# Altium PCB Ricky and Min Lin - ART Robot.PCBDOC
Units mm, origin at the board's own origin, x right, y up, seen from the top; angles counter-clockwise.
Board outline 53.34 x 68.58 mm, 2 copper layers (Top Layer, Bottom Layer), stack 1.671 mm thick; 25 components, 37 nets, 143 pads, 0 vias.
Unrouted connection lines stored in the file: 77.
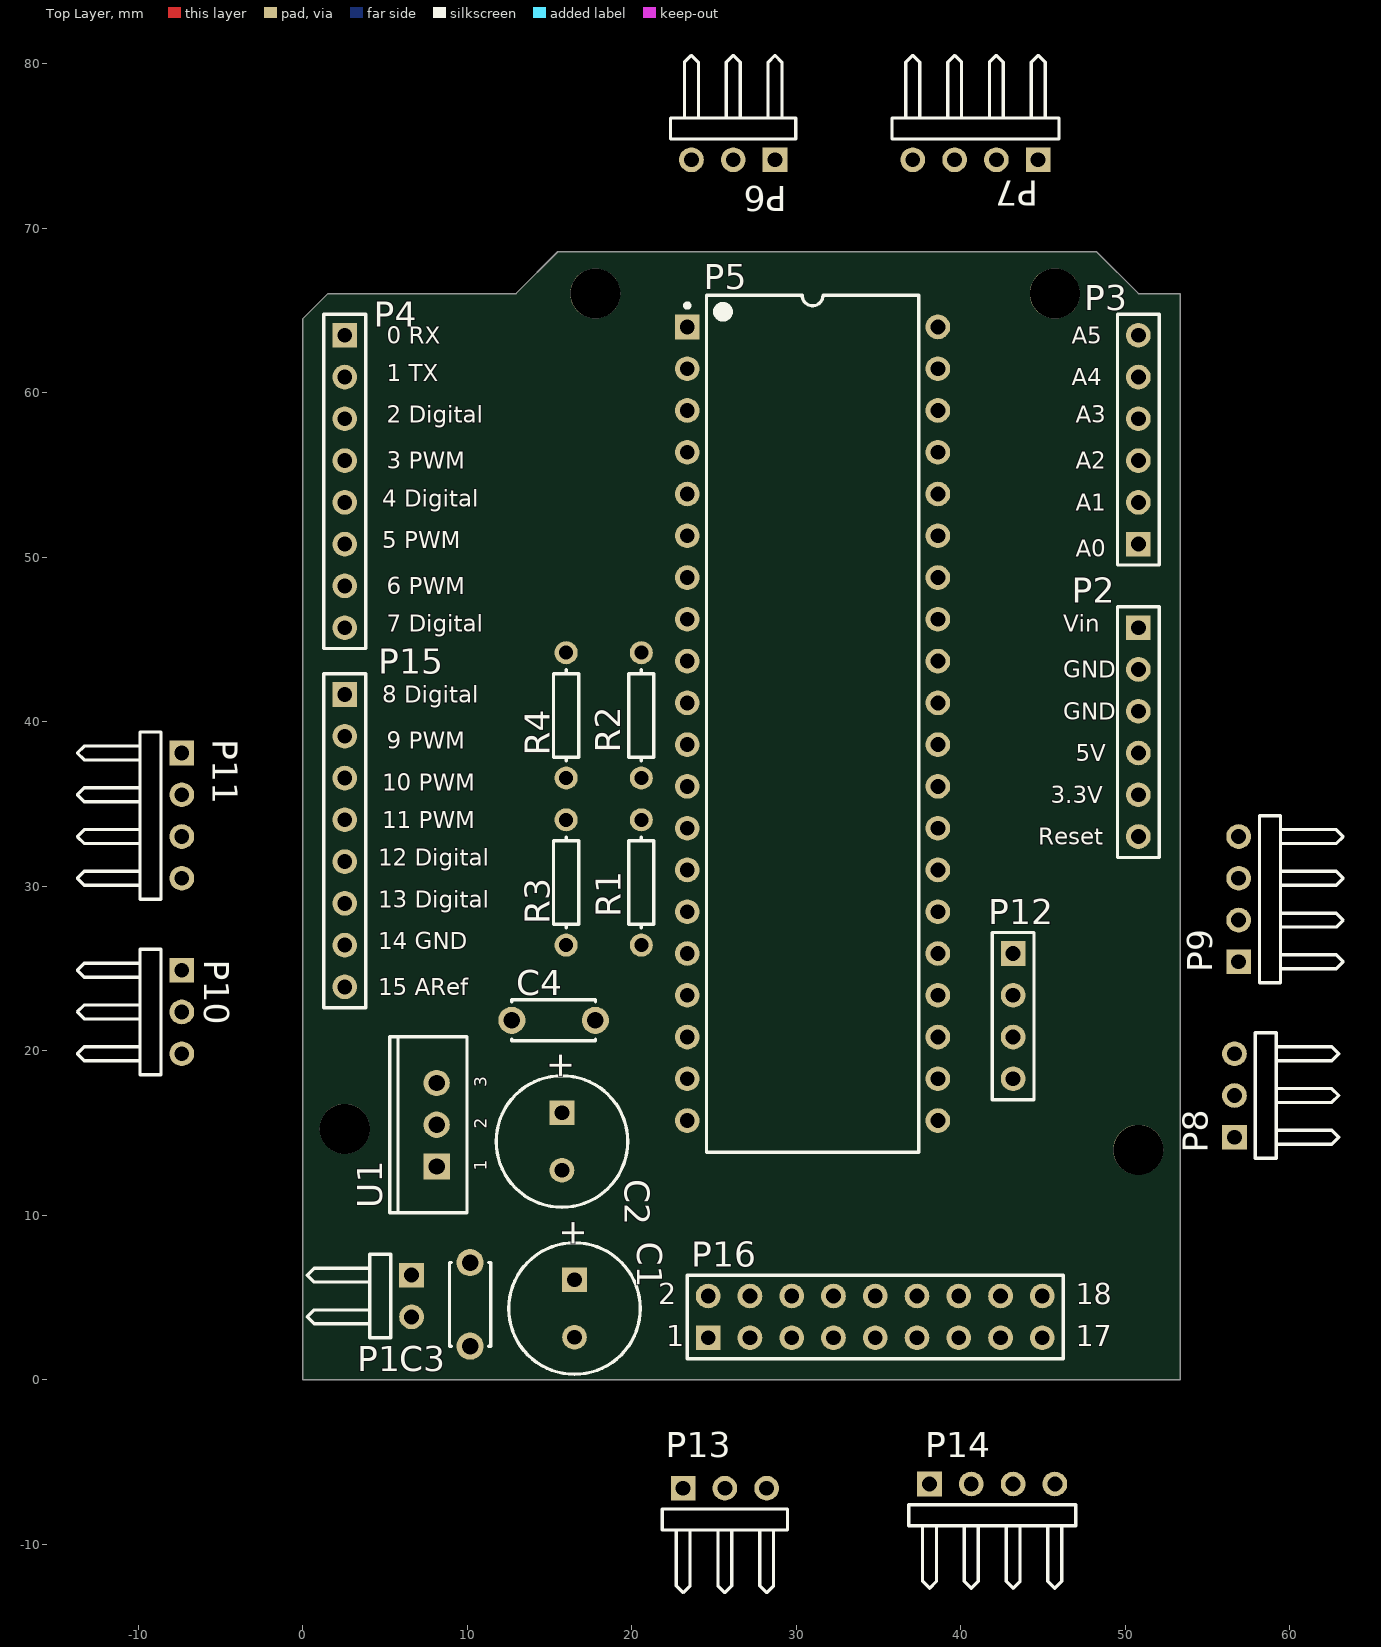
[diagram p0: Top Layer view]
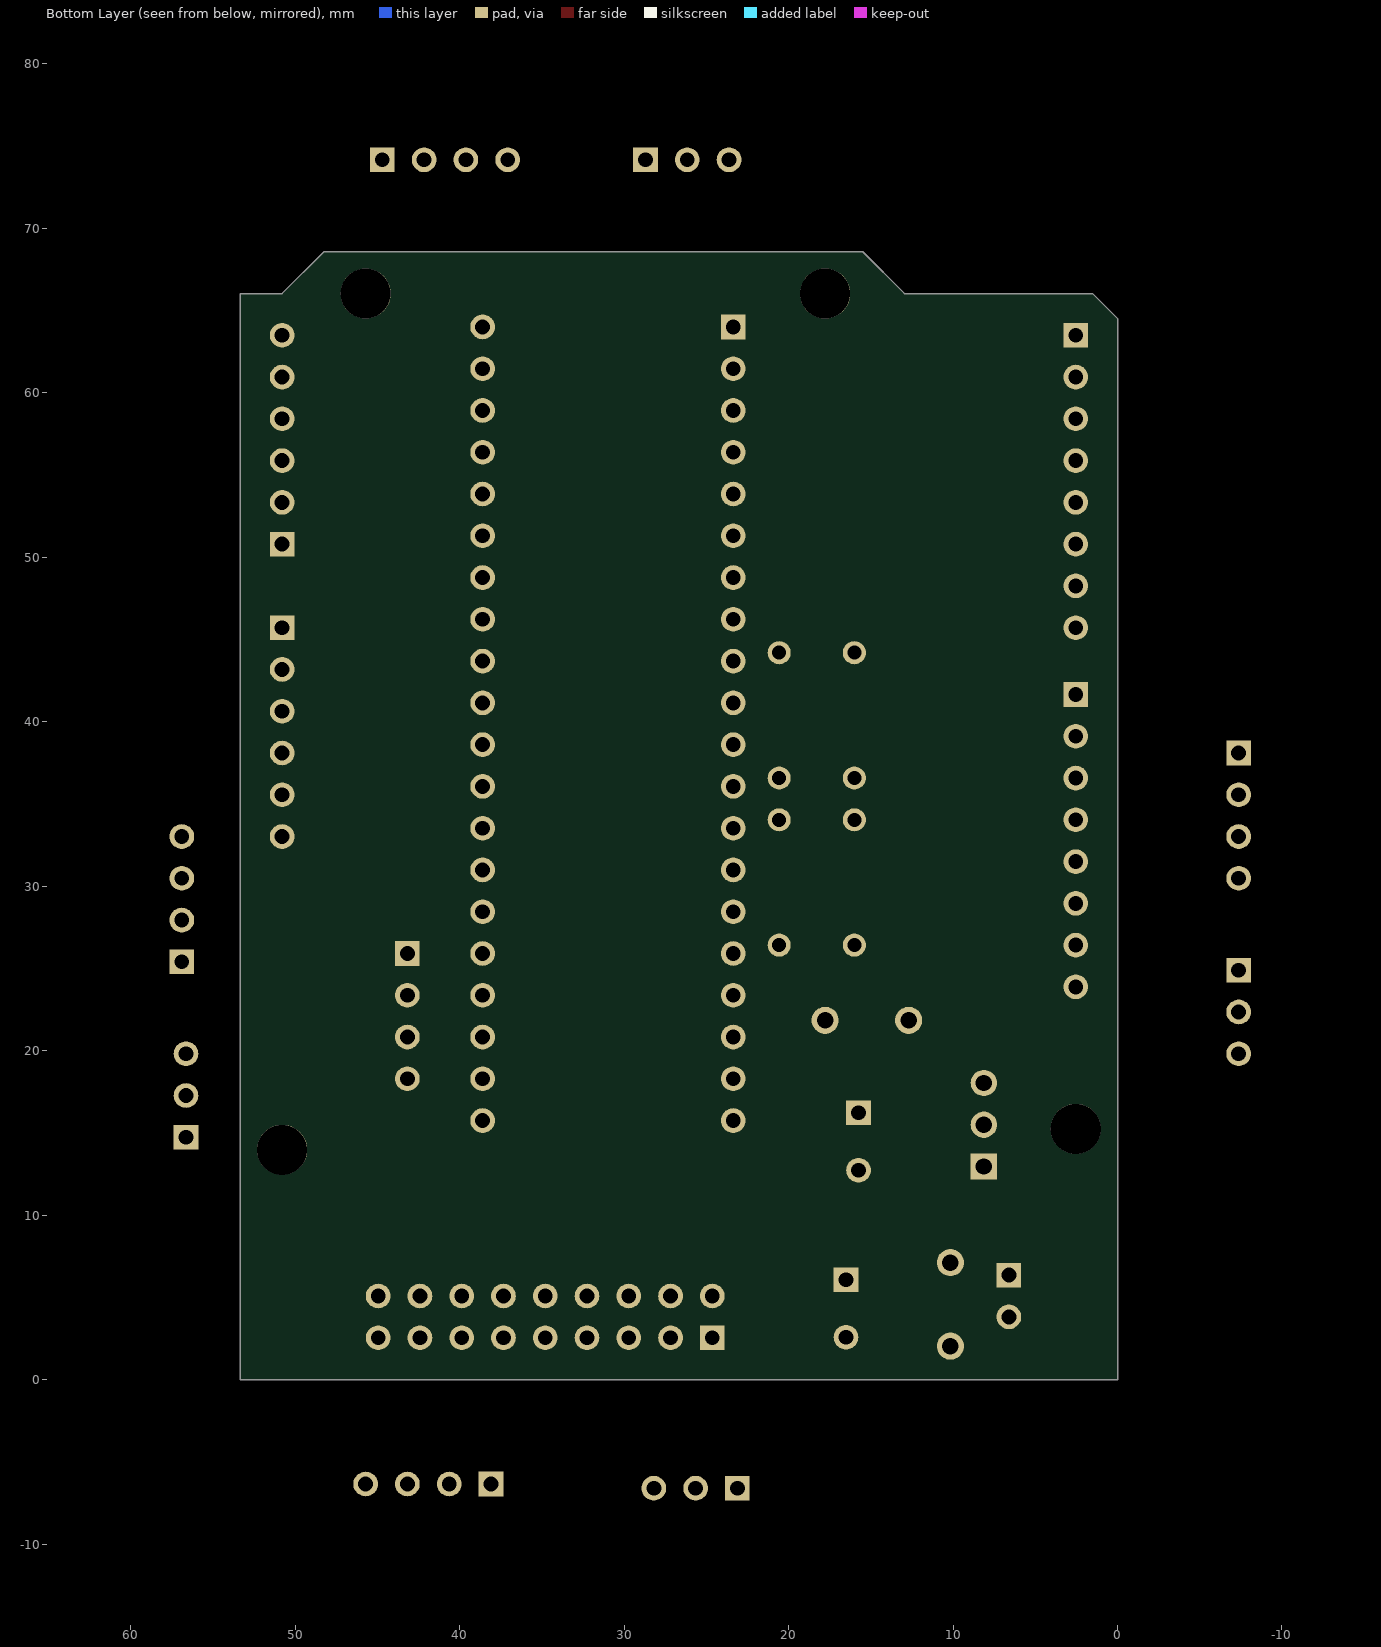
[diagram p1: Bottom Layer view, seen from below]

## Layer stack, top to bottom
Top Layer: signal copper 0.0356
Dielectric: core 1.6, FR-4, Dk 4.8
Bottom Layer: signal copper 0.0356

## Board outline
0,0 0,64.516 1.524,66.04 12.954,66.04 15.494,68.58 48.26,68.58 50.8,66.04 53.34,66.04 53.34,0

## Design rules (kind name [scope] priority, off if disabled: settings)
Clearance [All] p1: gap=0.254
ComponentClearance [All] p1: gap=0.051 collisioncheckmode=3 verticalgap=2540 showdistances=FALSE
FabricationTestPointUsage TestPointUsage [All] p1: valid=0 allowmultiple=FALSE
FabricationTestpoint Testpoint [All] p1: side=3 testpointundercomponent=TRUE minsize=1.016 maxsize=2.54 preferedsize=1.524 minholesize=0 maxholesize=1.016 preferedholesize=0.813 testpointgrid=0.025 allowsidetop=TRUE allowsidebottom=TRUE usegrid=TRUE gridtolerance=0
PolygonConnect [All] p1: connectstyle=Relief reliefconductorwidth=0.254 reliefentries=4 polygonreliefangle="90 Angle"
RoutingVias [All] p1: holewidth=0.711 width=1.27 viastyle="Through Hole" minholewidth=0.711 minwidth=1.27 maxholewidth=0.711 maxwidth=1.27
SilkscreenOverComponentPads [All] p1: minsilkscreentomaskgap=0.254
SolderMaskExpansion [All] p1: expansion=0.102
Width [All] p1: maxlimit=0.254 minlimit=0.254 preferedwidth=0.254
24 further rules are at their usual default settings.

## Components (designator, comment, footprint, x,y, rotation, side; value= is the part's Value field where it differs from the comment)
C1 "25V" E 16.51,4.318 r270 top
C2 "16V" E 15.748,14.478 r270 top
C3 "VP41BY104" VP41-2.5 10.16,4.572 r270 top
C4 "VP41BY104" VP41-2.5 15.24,21.844 r0 top
P1 "Battery Input" HDR1X2H 6.604,6.35 r270 top
P2 "Arduino Header" HDR1X6 50.8,45.72 r270 top locked
P3 "Arduino Header" HDR1X6 50.8,50.8 r90 top locked
P4 "Arduino Header" HDR1X8 2.54,63.5 r270 top locked
P5 "CPLD Header DIP 40" DIP-40 30.988,39.878 r0 top
P6 "IFH" HDR1X3H 28.702,74.168 r180 top
P7 "UFH" HDR1X4H 44.704,74.168 r180 top
P8 "IRH" HDR1X3H 56.642,14.732 r90 top
P9 "URH" HDR1X4H 56.896,25.4 r90 top
P10 "ILH" HDR1X3H -7.366,24.892 r270 top
P11 "ULH" HDR1X4H -7.366,38.1 r270 top
P12 "MH" HDR1X4 43.18,25.908 r270 top
P13 "IBH" HDR1X3H 23.114,-6.604 r0 top
P14 "UBH" HDR1X4H 38.1,-6.35 r0 top
P15 "Arduino Header" HDR1X8 2.54,41.656 r270 top locked
P16 "RFC-1100A" HDR2X9 24.638,2.54 r0 top
R1 "Res1" AXIAL-0.3 20.574,30.226 r90 top
R2 "Res1" AXIAL-0.3 20.574,40.386 r90 top
R3 "Res1" AXIAL-0.3 16.002,30.226 r90 top
R4 "Res1" AXIAL-0.3 16.002,40.386 r90 top
U1 "µA7805CKC" KC03 8.128,15.494 r90 top

## Footprints (in the part's own frame and the unit in brackets; to place one, negate y for a bottom-side part, rotate by r counter-clockwise, add the part's x,y. Pads: shape width x height; smd on the part's side, far side on the other; paste and mask are expansions set on the pad)
AXIAL-0.3 [mm] "Axial Device, Thru-Hole; 2 Leads; 0.3 in Pin Spacing"
  round 1.4 hole 0.85: 1(-3.81,0) 2(3.81,0)
  silkscreen extent -2.77,-0.76 2.77,0.76
DIP-40 [mm] "DIP, 40-Pin, Row Spacing 15.24 mm, Pitch 2.54 mm"
  rect 1.5x1.5 hole 0.9: 1(-7.62,24.13)
  round 1.5 hole 0.9: 2(-7.62,21.59) 3(-7.62,19.05) 4(-7.62,16.51) 5(-7.62,13.97) 6(-7.62,11.43) 7(-7.62,8.89) 8(-7.62,6.35) 9(-7.62,3.81) 10(-7.62,1.27) 11(-7.62,-1.27) 12(-7.62,-3.81) 13(-7.62,-6.35) 14(-7.62,-8.89) 15(-7.62,-11.43) 16(-7.62,-13.97) 17(-7.62,-16.51) 18(-7.62,-19.05) 19(-7.62,-21.59) 20(-7.62,-24.13) 21(7.62,-24.13) 22(7.62,-21.59) 23(7.62,-19.05) 24(7.62,-16.51) 25(7.62,-13.97) 26(7.62,-11.43) 27(7.62,-8.89) 28(7.62,-6.35) 29(7.62,-3.81) 30(7.62,-1.27) 31(7.62,1.27) 32(7.62,3.81) 33(7.62,6.35) 34(7.62,8.89) 35(7.62,11.43) 36(7.62,13.97) 37(7.62,16.51) 38(7.62,19.05) 39(7.62,21.59) 40(7.62,24.13)
  silkscreen extent -7.74,-26.05 6.45,26.05, body extent -7.42,-26.03 7.42,26.03, height 5.08
E [mm] "Capacitor, Electrolytic, Radial; Body 8 x 10.5 mm (Dia.xH typ); Pin Spacing 3.5 mm (typ)"
  rect 1.5x1.5 hole 0.9: 1(-1.75,0)
  round 1.5 hole 0.9: 2(1.75,0)
  silkscreen extent -4,-4 4,4
HDR1X2H [mm]
  rect 1.5x1.5 hole 0.9: 1(0,0)
  round 1.5 hole 0.9: 2(2.54,0)
  silkscreen extent -1.27,-6.35 3.81,-1.27
HDR1X3H [mm]
  rect 1.5x1.5 hole 0.9: 1(0,0)
  round 1.5 hole 0.9: 2(2.54,0) 3(5.08,0)
  silkscreen extent -1.27,-6.35 6.35,-1.27
HDR1X4 [mm] "Connector; Header; 4 Position"
  rect 1.5x1.5 hole 0.9: 1(0,0)
  round 1.5 hole 0.9: 2(2.54,0) 3(5.08,0) 4(7.62,0)
  silkscreen extent -1.27,-1.27 8.89,1.27
HDR1X4H [mm]
  rect 1.5x1.5 hole 0.9: 1(0,0)
  round 1.5 hole 0.9: 2(2.54,0) 3(5.08,0) 4(7.62,0)
  silkscreen extent -1.27,-6.35 8.89,-1.27
HDR1X6 [mm] "Connector; Header; 6 Position"
  rect 1.5x1.5 hole 0.9: 1(0,0)
  round 1.5 hole 0.9: 2(2.54,0) 3(5.08,0) 4(7.62,0) 5(10.16,0) 6(12.7,0)
  silkscreen extent -1.27,-1.27 13.97,1.27
HDR1X8 [mm] "Connector; Header; 8 Position"
  rect 1.5x1.5 hole 0.9: 1(0,0)
  round 1.5 hole 0.9: 2(2.54,0) 3(5.08,0) 4(7.62,0) 5(10.16,0) 6(12.7,0) 7(15.24,0) 8(17.78,0)
  silkscreen extent -1.27,-1.27 19.05,1.27
HDR2X9 [mm] "Connector; Header; 9x2 Position"
  rect 1.5x1.5 hole 0.9: 1(0,0)
  round 1.5 hole 0.9: 2(0,2.54) 3(2.54,0) 4(2.54,2.54) 5(5.08,0) 6(5.08,2.54) 7(7.62,0) 8(7.62,2.54) 9(10.16,0) 10(10.16,2.54) 11(12.7,0) 12(12.7,2.54) 13(15.24,0) 14(15.24,2.54) 15(17.78,0) 16(17.78,2.54) 17(20.32,0) 18(20.32,2.54)
  silkscreen extent -1.27,-1.27 21.59,3.81
KC03 [mm] "TO, Thru-Hole, Vertical, Heatsink Mounted; 3 In-Line Leads; Pitch 2.54 mm"
  rect 1.6x1.6 hole 1: 1(-2.54,0)
  round 1.6 hole 1: 2(0,0) 3(2.54,0)
  silkscreen extent -5.35,-1.85 5.35,2.85
VP41-2.5 [mm] "Capacitor, Ceramic, Thru-Hole, Dipped Radial; Body 5.1 x 2.5 mm (WxT) Pin Spacing 5.08 mm (typ)"
  round 1.65 hole 1: 1(-2.54,0) 2(2.54,0)
  silkscreen extent -2.55,-1.25 2.55,1.25

## Part data
C1: library part 94SC226X0025EBP, "Solid Aluminum Capacitor with Organic Semiconductor Electrolyte: 22uF, 25V, Bulk Pack"
C2: library part 94SH107X0016EBP, "Solid Aluminum Capacitor with Organic Semiconductor Electrolyte: 100uF, 16V, Bulk Pack"
C3 C4: "Dipped Radial Multilayer Ceramic Capacitor X7R: 100nF"
P1: library part "CONN 2 PIN 2.54mm Latch RA Tin", "CONN 2 PINS 2.54mm Wire to Board Latch RA Tin"
P2 P3: library part "Header 6", "Header, 6-Pin"
P4 P15: library part "Header 8", "Header, 8-Pin"
P5: library part "Header DIP 40", "Header, 20-Pin, Dual row"
P6 P8 P10 P13: library part "CONN 3 PIN 2.54mm Latch RA Tin", "CONN 3 PINS 2.54mm Wire to Board Latch RA Tin"
P7 P9 P11 P14: library part "CONN 4 PIN 2.54mm Latch RA Tin", "CONN 4 PINS 2.54mm Wire to Board Latch RA Tin"
P12: library part "Header 4", "Header, 4-Pin"
P16: library part "Header 9X2", "Header, 9-Pin, Dual row"
R1 R2 R3 R4: "Resistor"
U1: "Positive-Voltage Regulator"

## Free pads (board coordinates)
  round 3.048 hole 3.048: 0(2.54,15.24) 1(50.8,13.97) 2(45.72,66.04) 3(17.78,66.04)

## Nets (pads, with @x,y where several pads share a name; then routed paths per layer and width w, separated by ;. In a path a pad name is that pad's centre, name@x,y a point inside that pad or via, vN(x,y) a via of type N, cw(c..) or ccw(c..) an arc to the next point about the centre after c; other vN are vias at no path point)
3.3V: P2.5 P16.5
5V: C2.1 C4.1 P5.20 P6.1 P7.1 P8.1 P9.1 P10.1 P11.1 P13.1 P14.1 P16.1 P16.3 R1.2 R2.2 R3.2 R4.2 U1.3
A0: P3.1 P5.37
A1: P3.2 P5.38
A2: P3.3 P5.39
A3: P3.4 P5.40
CSN: P16.11
GDO0: P15.3 P16.12
GDO2: P16.10
GND: C1.2 C2.2 C3.2 C4.2 P1.2 P2.2 P2.3 P5.21 P6.2 P7.4 P8.2 P9.4 P10.2 P11.4 P13.2 P14.4 P15.7 P16.2 P16.4 P16.17 P16.18 U1.2
IRB: P5.19 P13.3 R4.1
IRF: P5.16 P6.3 R1.1
IRL: P5.18 P10.3 R3.1
IRR: P5.17 P8.3 R2.1
NetP5_22: P5.22 P12.4
NetP5_23: P5.23 P12.3
NetP5_24: P5.24 P12.2
NetP5_25: P5.25 P12.1
P1: P4.3 P5.1
P2: P4.4 P5.2
P3: P4.5 P5.3
P4: P4.6 P5.4
P9: P4.7 P5.9
P10: P4.8 P5.10
PAC: P16.9
SCLK: P15.6 P16.8
SI: P15.4 P16.6
SO: P15.5 P16.7
UB_ECHO: P5.29 P14.3
UB_PING: P5.30 P14.2
UF_ECHO: P5.35 P7.3
UF_PING: P5.36 P7.2
UL_ECHO: P5.31 P11.3
UL_PING: P5.32 P11.2
UR_ECHO: P5.33 P9.3
UR_PING: P5.34 P9.2
VIN: C1.1 C3.1 P1.1 P2.1 U1.1
pads on no net: P2.4 P2.6 P3.5 P3.6 P4.1 P4.2 P5.5 P5.6 P5.7 P5.8 P5.11 P5.12 P5.13 P5.14 P5.15 P5.26 P5.27 P5.28 P15.1 P15.2 P15.8 P16.13 P16.14 P16.15 P16.16

## Silkscreen, mask and mechanical layers (free items; w line width, h text height)
Top Overlay:
  text "0 RX" at 5.08,62.992 h1.02
  text "A5" at 46.736,62.992 h1.02
  text "1 TX" at 5.08,60.706 h1.02
  text "A4" at 46.736,60.452 h1.02
  text "2 Digital" at 5.08,58.166 h1.02
  text "A3" at 46.99,58.166 h1.02
  text "3 PWM" at 5.08,55.372 h1.02
  text "A2" at 46.99,55.372 h1.02
  text "4 Digital" at 4.826,53.086 h1.02
  text "A1" at 46.99,52.832 h1.02
  text "5 PWM" at 4.826,50.546 h1.02
  text "A0" at 46.99,50.038 h1.02
  text "6 PWM" at 5.08,47.752 h1.02
  text "7 Digital" at 5.08,45.466 h1.02
  text "Vin" at 46.228,45.466 h1.02
  text "GND" at 46.228,42.672 h1.02
  text "8 Digital" at 4.826,41.148 h1.02
  text "GND" at 46.228,40.132 h1.02
  text "9 PWM" at 5.08,38.354 h1.02
  text "5V" at 46.99,37.592 h1.02
  text "10 PWM" at 4.826,35.814 h1.02
  text "3.3V" at 45.466,35.052 h1.02
  text "11 PWM" at 4.826,33.528 h1.02
  text "Reset" at 44.704,32.512 h1.02
  text "12 Digital" at 4.572,31.242 h1.02
  text "13 Digital" at 4.572,28.702 h1.02
  text "14 GND" at 4.572,26.162 h1.02
  text "15 ARef" at 4.572,23.368 h1.02
Board:
  drawing of 10098 lines, arcs and shapes, not listed
  text ".Printout_Name" at -129.607,171.228 h2
Information:
  drawing of 153 lines, arcs and shapes, not listed
  text "1" at -107.413,180.399 h1.78
  text "2" at -35.641,180.399 h1.78
  text "3" at 36.114,180.399 h1.78
  text "4" at 108.275,180.399 h1.78
  text "5" at 180.259,180.399 h1.78
  text "6" at 252.268,180.399 h1.78
  text "NOTES" at 200.493,170.528 h5
  text "Fabrication per IPC-A-600" at 200.493,164.653 h3.77
  text "118mm x 118mm" at 250.893,160.103 h3
  text "Board Size" at 200.493,160.039 h3
  text "1.6mm +/- 0.1mm" at 250.893,157.315 h3
  text "Board Thickness" at 200.493,157.261 h3
  text "2 Layers" at 250.893,154.528 h3
  text "Number of Layers" at 200.493,154.483 h3
  text "FR4" at 250.893,151.803 h3
  text "Material" at 200.493,151.705 h3
  text "Copper Thickness" at 200.493,148.927 h3
  text "1 oz" at 250.893,148.903 h3
  text "A" at -141.102,148.827 h1.78
  text "A" at 285.618,148.827 h1.78
  text "Pads Finish" at 200.493,146.149 h3
  text "HASL" at 250.893,146.165 h3
  text "Solder Mask" at 200.493,143.371 h3
  text "Yes" at 250.893,143.378 h3
  text "Solder Mask Type" at 200.493,140.593 h3
  text "LPI" at 250.893,140.59 h3
  text "Solder Mask Color" at 200.493,137.815 h3
  text "Green" at 250.893,137.803 h3
  text "Silkscreen Color" at 200.493,135.037 h3
  text "White" at 250.893,135.015 h3
  text "Silkscreen Layers" at 200.493,132.259 h3
  text "Top" at 250.893,132.203 h3
  text "Smallest Trace Size" at 200.493,129.481 h3
  text "0.254 mm" at 250.893,129.441 h3
  text "Smallest clearance between traces" at 200.493,126.703 h3
  text "0.2 mm" at 250.893,126.603 h3
  text "Panelisation" at 200.493,123.925 h3
  text "Single Board" at 250.893,123.703 h3
  text "Electrical Test" at 200.493,121.147 h3
  text "Yes" at 250.893,121.078 h3
  text "Number of Slotted Holes" at 200.493,118.203 h3
  text "0 Slotted Holes" at 250.893,118.203 h3
  text "Internal Routed Holes" at 200.493,115.103 h3
  text "0 Routed Holes" at 250.893,115.003 h3
  text "Tolerance:  	+/- 0.05 mm" at 200.493,109.091 h3
  text "All of the hole sizes are the finished size." at 200.493,106.313 h3
  text "Do not alter artwork ex: add logo or date code" at 200.493,103.403 h3
  text "B" at -141.102,79.384 h1.78
  text "B" at 285.618,79.384 h1.78
  text "C" at -141.102,8.746 h1.78
  text "C" at 285.618,8.746 h1.78
  text "Layer Stack Up Detail for: Ricky and Min Lin - ART Robot.PCBDOC" at 219.202,-29.546 h0.9
  text "Layer" at 219.202,-33.811 h0.55
  text "Gerber" at 233.884,-33.811 h0.55
  text "Copper" at 241.446,-33.811 h0.55
  text "Dielectric" at 249.905,-33.811 h0.55
  text "Dielectric" at 258.749,-33.811 h0.55
  text "Dielectric" at 269.682,-33.811 h0.55
  text "Name" at 219.202,-34.911 h0.55
  text "Document" at 233.884,-34.911 h0.55
  text "Thickness" at 241.446,-34.911 h0.55
  text "Height" at 249.905,-34.911 h0.55
  text "Material" at 258.749,-34.911 h0.55
  text "Type" at 269.682,-34.911 h0.55
  text "Top Solder Mask" at 219.202,-37.38 h0.75
  text "(.GTS)" at 233.884,-37.38 h0.75
  text "0.0102mm" at 249.905,-37.38 h0.75
  text "Solder Resist" at 258.749,-37.38 h0.75
  text "Top Layer" at 219.202,-41.36 h0.75
  text "(.GTL)" at 233.884,-41.36 h0.75
  text "0.0356mm" at 241.446,-41.36 h0.75
  text "1.6mm" at 249.905,-43.349 h0.75
  text "FR-4" at 258.749,-43.349 h0.75
  text "Core" at 269.682,-43.349 h0.75
  text "Bottom Layer" at 219.202,-45.339 h0.75
  text "(.GBL)" at 233.884,-45.339 h0.75
  text "0.0356mm" at 241.446,-45.339 h0.75
  text "Bottom Solder Mask" at 219.202,-49.318 h0.75
  text "(.GBS)" at 233.884,-49.318 h0.75
  text "0.0102mm" at 249.905,-49.318 h0.75
  text "Solder Resist" at 258.749,-49.318 h0.75
  text "ALL DIMENSIONS ARE IN MILLIMETER UNLESS SPECIFIED" at 134.443,-58.772 h1.52
  text "ENGINEER:" at 170.683,-62.552 h1.14
  text "TITLE:" at 208.783,-62.552 h1.14
  text "D" at -141.102,-62.933 h1.78
  text "D" at 285.618,-62.933 h1.78
  text "P. Belanger" at 171.583,-65.641 h1.52
  text "PROJECT: ART Robot" at 211.356,-66.607 h1.78
  text "Hikaritech inc." at 137.493,-67.172 h5
  text "PCB DESIGNER:" at 170.683,-70.045 h1.14
  text "TITLE : Arduino Uno CPLD Daughter Board" at 211.356,-73.124 h1.78
  text "P. Belanger" at 171.483,-73.541 h1.52
  text "29-1560 Prince St." at 137.49,-75.372 h3
  text "DATE:" at 170.683,-77.792 h1.14
  text "REV:" at 262.123,-77.792 h1.14
  text "Port-Moody, BC, Canada" at 137.493,-78.372 h3
  text "2011/01/16" at 171.583,-80.841 h1.52
  text "2011/01/16" at 209.083,-81.041 h1.52
  text "V3H 3W8" at 137.496,-81.372 h3
  text "1" at 264.287,-81.615 h1.78
  text "FILE NAME:" at 170.683,-85.412 h1.14
  text "DWG NO:" at 208.783,-85.412 h1.14
  text "SCALE:" at 262.123,-85.412 h1.14
  text ".Pcb_File_Name_No_Path" at 170.693,-88.372 h1.52
  text "Tel: 604-809-6267" at 137.493,-88.572 h3
  text "1" at 211.385,-88.988 h1.78
  text "TABLOID" at 264.287,-89.408 h1.78
  text "1" at -107.413,-93.921 h1.78
  text "2" at -35.641,-93.921 h1.78
  text "3" at 36.114,-93.921 h1.78
  text "4" at 108.275,-93.921 h1.78
  text "5" at 180.259,-93.921 h1.78
  text "6" at 252.268,-93.921 h1.78
Drill Drawing:
  text ".Legend" at -57.404,-83.743 h1.5
  text "DRILL LEGEND" at -57.912,-88.315 h1.5

## Text inside footprints (layer, text, board x,y; h text height)
C1: Top Overlay "+" at 15.76,9.793 h1.5 r270
C2: Top Overlay "+" at 14.998,19.953 h1.5 r270
P16: Top Overlay "18" at 46.99,4.572 h1.27; Top Overlay "17" at 46.99,2.032 h1.27; Top Overlay "1" at 22.098,2.032 h1.27; Top Overlay "2" at 21.59,4.572 h1.27
U1: Top Overlay "2" at 11.176,15.24 h0.76 r90; Top Overlay "1" at 11.176,12.7 h0.76 r90; Top Overlay "3" at 11.176,17.78 h0.76 r90